# EAGLE board miniArduino (EAGLE 8.4.3)
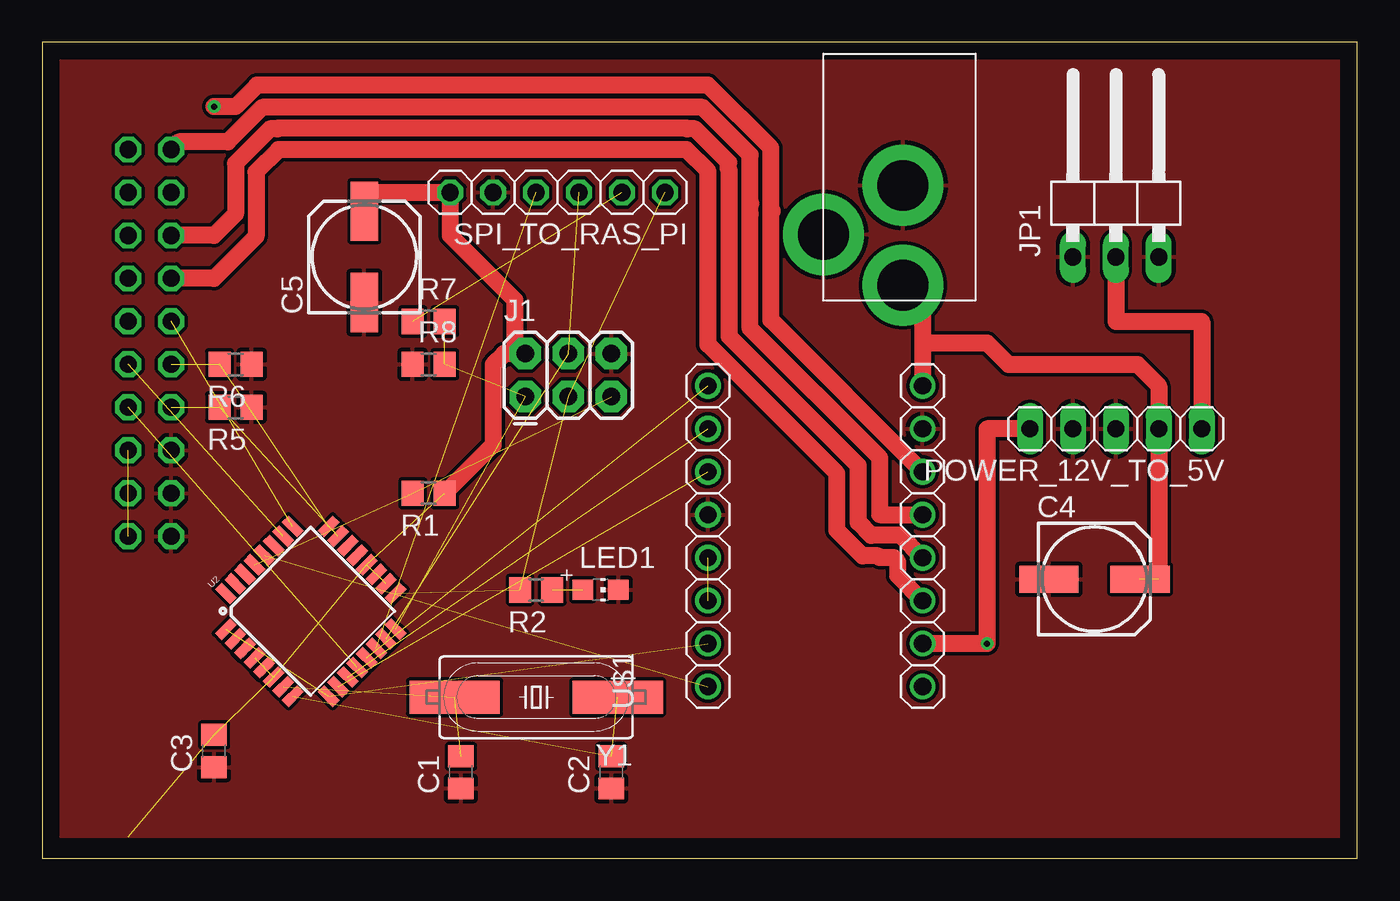
[diagram p0: board, top side]
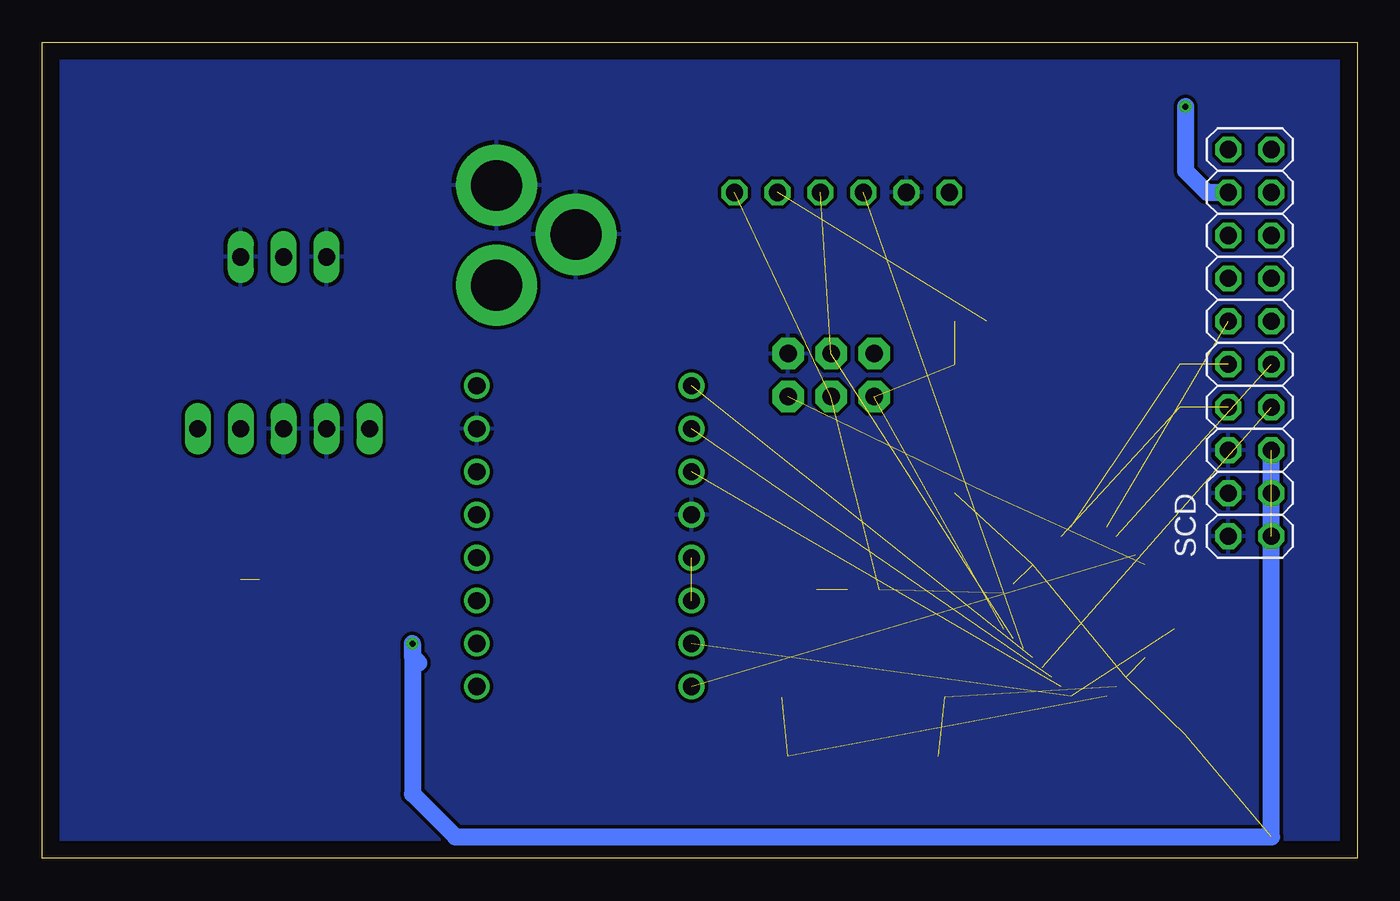
[diagram p1: board, bottom side, seen from below]

Size 77.78 x 48.25 mm. Coordinates in mm from the lower left corner, seen from the top.
Outline: 0,0 77.78,0 77.78,48.25 0,48.25 0,0
Copper layers (1*16): Top 0.035mm / dielectric 1.5mm / Bottom 0.035mm
Design rules "default": minimum track width 10mil, minimum drill 24mil, track to track 8mil, track to pad 8mil, pad to pad 8mil, via to via 8mil, smd to smd 8mil, copper to edge 40mil, drill to drill 8mil, minimum pad ring 10mil, minimum via ring 8mil, stop-mask expansion 4mil, vias tented up to drill 0mil, thermal gap 10mil

## Footprints (pad centres in the part's own frame; a part is rotated, then mirrored left to right if it is on the bottom)
C0805 = smd 1.3 x 1.5: 1 -0.95,0; 2 0.95,0
153CLV-0605 = smd 3.5 x 1.6: + 2.7,0; - -2.7,0
2X3 = drill 1.016 pad 1.88 octagon: 1 0,0; 2 0,2.54; 3 2.54,0; 4 2.54,2.54; 5 5.08,0; 6 5.08,2.54
1X03/90 = drill 1.016 long: 1 -2.54,-3.81; 2 0,-3.81; 3 2.54,-3.81
CHIP-LED0805 = smd 1.2 x 1.2: A 0,-1.05; C 0,1.05
PJ-102A = drill 3 pad 4.8: RING 0.1,-3.39; RING_SW -4.6,-6.29; TIP 0.1,-9.29
1X05 = drill 1.016 long: 1 -5.08,0; 2 -2.54,0; 3 0,0; 4 2.54,0; 5 5.08,0
R0805 = smd 1.3 x 1.5: 1 -0.95,0; 2 0.95,0
2X10 = drill 1.016 octagon: 1 -11.43,-1.27; 2 -11.43,1.27; 3 -8.89,-1.27; 4 -8.89,1.27; 5 -6.35,-1.27; 6 -6.35,1.27; 7 -3.81,-1.27; 8 -3.81,1.27; 9 -1.27,-1.27; 10 -1.27,1.27; 11 1.27,-1.27; 12 1.27,1.27; 13 3.81,-1.27; 14 3.81,1.27; 15 6.35,-1.27; 16 6.35,1.27; 17 8.89,-1.27; 18 8.89,1.27; 19 11.43,-1.27; 20 11.43,1.27
1X06 = drill 1.016 octagon: 1 -6.35,0; 2 -3.81,0; 3 -1.27,0; 4 1.27,0; 5 3.81,0; 6 6.35,0
TQFP32-08 = smd 1.27 x 0.559: 1 -4.293,2.8; 2 -4.293,2; 3 -4.293,1.2; 4 -4.293,0.4; 5 -4.293,-0.4; 6 -4.293,-1.2; 7 -4.293,-2; 8 -4.293,-2.8; 17 4.293,-2.8; 18 4.293,-2; 19 4.293,-1.2; 20 4.293,-0.4; 21 4.293,0.4; 22 4.293,1.2; 23 4.293,2; 24 4.293,2.8 | smd 0.559 x 1.27: 9 -2.8,-4.293; 10 -2,-4.293; 11 -1.2,-4.293; 12 -0.4,-4.293; 13 0.4,-4.293; 14 1.2,-4.293; 15 2,-4.293; 16 2.8,-4.293; 25 2.8,4.293; 26 2,4.293; 27 1.2,4.293; 28 0.4,4.293; 29 -0.4,4.293; 30 -1.2,4.293; 31 -2,4.293; 32 -2.8,4.293
A4988_BREAKOUT = drill 1.016: 1 1.27,-11.43; 2 3.81,-11.43; 3 6.35,-11.43; 4 8.89,-11.43; 5 11.43,-11.43; 6 13.97,-11.43; 7 16.51,-11.43; 8 19.05,-11.43; 9 19.05,1.27; 10 16.51,1.27; 11 13.97,1.27; 12 11.43,1.27; 13 8.89,1.27; 14 6.35,1.27; 15 3.81,1.27; 16 1.27,1.27
HC49UP = smd 5.334 x 1.93: 1 -4.826,0; 2 4.826,0

## Placement (x,y rotation side)
C1  22p  [C0805]  24.77,5.08 90 top
C2  22p  [C0805]  33.66,5.08 90 top
C3  100n  [C0805]  10.16,6.35 90 top
C4  [153CLV-0605]  62.23,16.51 0 top
C5  [153CLV-0605]  19.05,35.56 90 top
J1  AVR_SPI_PRG_6PTH  [2X3]  28.57,27.3 0 top
JP1  [1X03/90]  63.5,39.37 0 top
LED1  [CHIP-LED0805]  33.02,15.88 270 top
POWER_12V  2.1MMJACKTHM  [PJ-102A]  50.8,43.18 0 top
POWER_12V_TO_5V  [1X05]  63.5,25.4 180 top
R1  10k  [R0805]  22.86,21.59 180 top
R2  1k  [R0805]  29.21,15.88 180 top
R5  220  [R0805]  11.43,26.67 180 top
R6  220  [R0805]  11.43,29.21 180 top
R7  2,2k  [R0805]  22.86,31.75 0 top
R8  4,7k  [R0805]  22.86,29.21 0 top
SCD  [2X10]  6.35,30.48 90 bottom
SPI_TO_RAS_PI  [1X06]  30.48,39.37 180 top
U2  ATMEGA328P_TQFP  [TQFP32-08]  15.88,14.61 45 top
U$1  A4998_BREAKOUT  [A4988_BREAKOUT]  40.64,8.89 90 top
Y1  [HC49UP]  29.21,9.52 180 top

## Library data of the parts
C1-C5 = rcl
J1 = SparkFun-Connectors
JP1 = pinhead
LED1 POWER_12V SPI_TO_RAS_PI = adafruit
POWER_12V_TO_5V SCD = pinhead2
R1 R2 R5-R8 = resistor
U2 = SparkFun-DigitalIC; PROD_ID: IC-09069
U$1 = tim
Y1 = SparkFun-FreqCtrl

## Nets
5V: C3.2 C5.+ J1.2 POWER_12V_TO_5V.5 R1.1 SCD.1 SCD.3 SCD.5 SPI_TO_RAS_PI.6 U2.4 U2.6 U2.18 U2.20 U$1.2
12V: C4.+ POWER_12V.TIP POWER_12V_TO_5V.2 U$1.8
ENA5V: JP1.2 POWER_12V_TO_5V.1
GND: C1.1 C2.1 C3.1 C4.- C5.- J1.6 JP1.1 JP1.3 LED1.C POWER_12V.RING POWER_12V.RING_SW POWER_12V_TO_5V.3 POWER_12V_TO_5V.4 R5.1 R6.1 R8.1 SCD.2 SCD.4 SCD.6 SPI_TO_RAS_PI.5 U2.3 U2.5 U2.21 U$1.7 U$1.12
MISO: J1.1 R7.2 R8.2 U2.16
MOSI: J1.4 SPI_TO_RAS_PI.3 U2.15
MS1: U2.11 U$1.10
MS2: U2.10 U$1.11
N$1: SCD.20 U$1.5
N$2: R7.1 SPI_TO_RAS_PI.2
N$5: U2.1 U2.9 U$1.15
N$6: LED1.A R2.1
N$8: C1.2 U2.7 Y1.2
N$9: C2.2 U2.8 Y1.1
N$12: U2.13 U$1.9
N$13: SCD.7 U2.12
N$14: U2.28 U$1.16
N$15: U$1.13 U$1.14
N$16: R5.2 SCD.8 U2.23
N$17: R6.2 SCD.10 U2.24
N$18: SCD.12 U2.25
N$19: SCD.9 U2.26
N$20: SCD.14 U$1.3
N$21: SCD.16 U$1.4
N$22: SCD.18 U$1.6
RESET: J1.5 R1.2 U2.29
SCK: J1.3 R2.2 SPI_TO_RAS_PI.1 U2.17
SS: SPI_TO_RAS_PI.4 U2.14

## Tracks (layer width: path | path; a pad name or v marks a point on that pad's centre or on a via)
5V  (via drill 0.35)  (8 unrouted)
  Top 1.016: POWER_12V_TO_5V.5 55.88,25.4 v55.88,12.7 U$1.2 | C5.+ 19.05,39.37 SPI_TO_RAS_PI.6 24.13,36.83 27.94,33.02 27.94,30.48 J1.2 27.3,29.85 26.67,29.21 26.67,24.45 R1.1
  Bottom 1.016: SCD.5 5.08,1.27 53.34,1.27 55.88,3.81 v55.88,12.7 55.88,11.94 55.5,11.56
12V  (1 unrouted)
  Top 1.016: 66.04,16.51 POWER_12V_TO_5V.2 66.04,27.94 64.77,29.21 57.15,29.21 55.88,30.48 52.07,30.48 | POWER_12V.TIP 52.07,32.72 52.07,30.48 | 52.07,30.48 U$1.8
ENA5V
  Top 1.016: JP1.2 63.5,31.75 68.58,31.75 POWER_12V_TO_5V.1
GND
  pour Top: 0,48.26 77.47,48.26 77.47,1.27 0,1.27
  pour Bottom: -1.27,48.26 95.25,48.26 93.98,46.99 93.98,-1.27 -1.27,-1.27
MISO  (3 unrouted)
MOSI  (2 unrouted)
MS1  (1 unrouted)
MS2  (1 unrouted)
N$1
  Top 1.016: U$1.5 49.53,20.32 49.53,23.68 41.87,31.34 41.87,38.1 | 41.87,38.1 41.87,38.68 41.91,38.72 | 41.87,38.1 41.86,38.11 41.86,41.6 39.06,44.4 13.01,44.4 10.98,42.36 8.07,42.36 SCD.20
N$2  (1 unrouted)
N$5  (2 unrouted)
N$6  (1 unrouted)
N$8  (2 unrouted)
N$9  (2 unrouted)
N$12  (1 unrouted)
N$13  (1 unrouted)
N$14  (1 unrouted)
N$15  (1 unrouted)
N$16  (2 unrouted)
N$17  (2 unrouted)
N$18  (1 unrouted)
N$19  (1 unrouted)
N$20
  Top 1.016: 50.57,17.55 50.6,17.53 | U$1.3 50.6,16.71 50.6,17.53 | 50.6,17.53 50.35,17.78 49.53,17.78 49.43,17.88 48.52,17.88 46.99,19.41 46.99,22.77 39.37,30.39 39.37,40.64 38.1,41.91 13.97,41.91 12.65,40.59 12.65,36.78 10.16,34.29 SCD.14
N$21
  Top 1.016: U$1.4 50.75,19.1 49.02,19.1 48.26,19.87 48.26,23.22 40.64,30.84 40.64,40.64 40.59,40.69 40.59,41.15 38.6,43.13 38.15,43.13 38.1,43.18 13.97,43.18 13.92,43.13 13.46,43.13 11.43,41.09 11.43,38.1 10.16,36.83 SCD.16
N$22  (via drill 0.35)
  Top 1.016: 43.18,38.27 43.09,38.18 | U$1.6 43.09,31.84 43.09,38.18 | 43.09,38.18 43.09,42 39.37,45.72 12.7,45.72 11.43,44.45 v10.16,44.45
  Bottom 1.016: v10.16,44.45 10.16,40.64 8.89,39.37 SCD.18
RESET  (2 unrouted)
SCK  (3 unrouted)
SS  (1 unrouted)